# Altium PCB IPD171.PcbDoc
Units mm, origin at the board's own origin, x right, y up, seen from the top; angles counter-clockwise.
Board outline 30 x 30 mm, 2 copper layers (Top Layer, Bottom Layer); 1 components, 3 nets, 11 pads, 0 vias.
Unrouted connection lines stored in the file: 1.
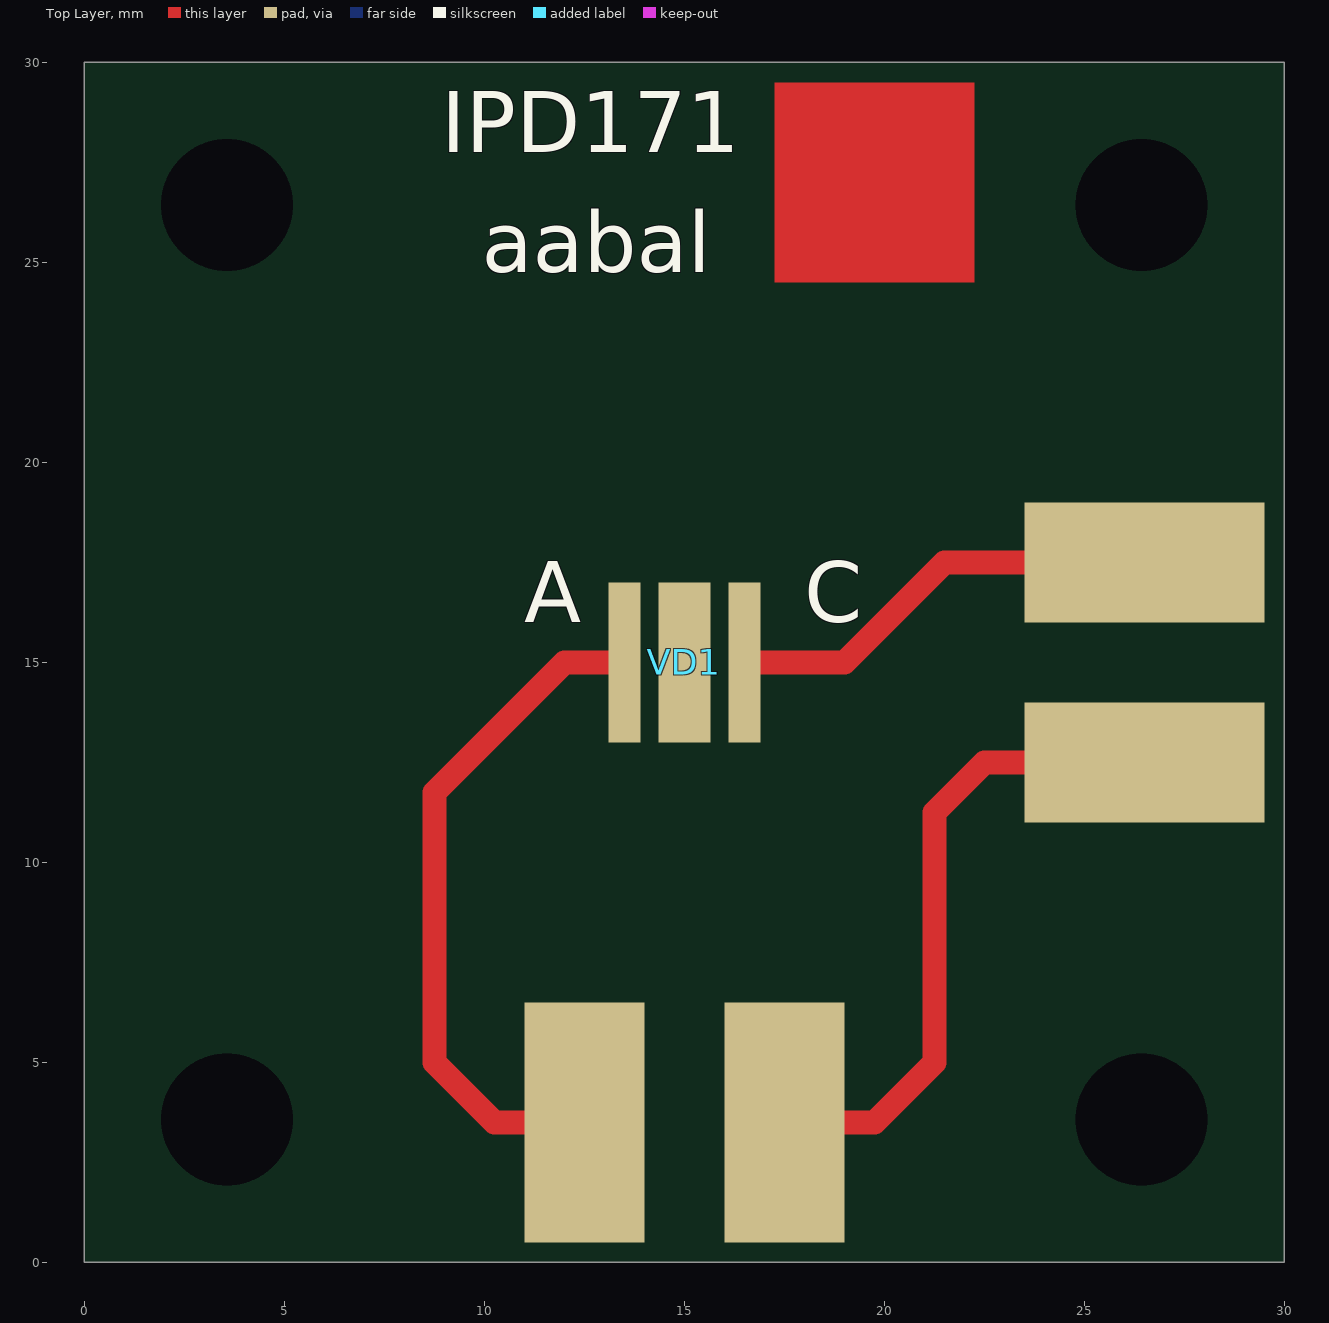
[diagram p0: Top Layer view]
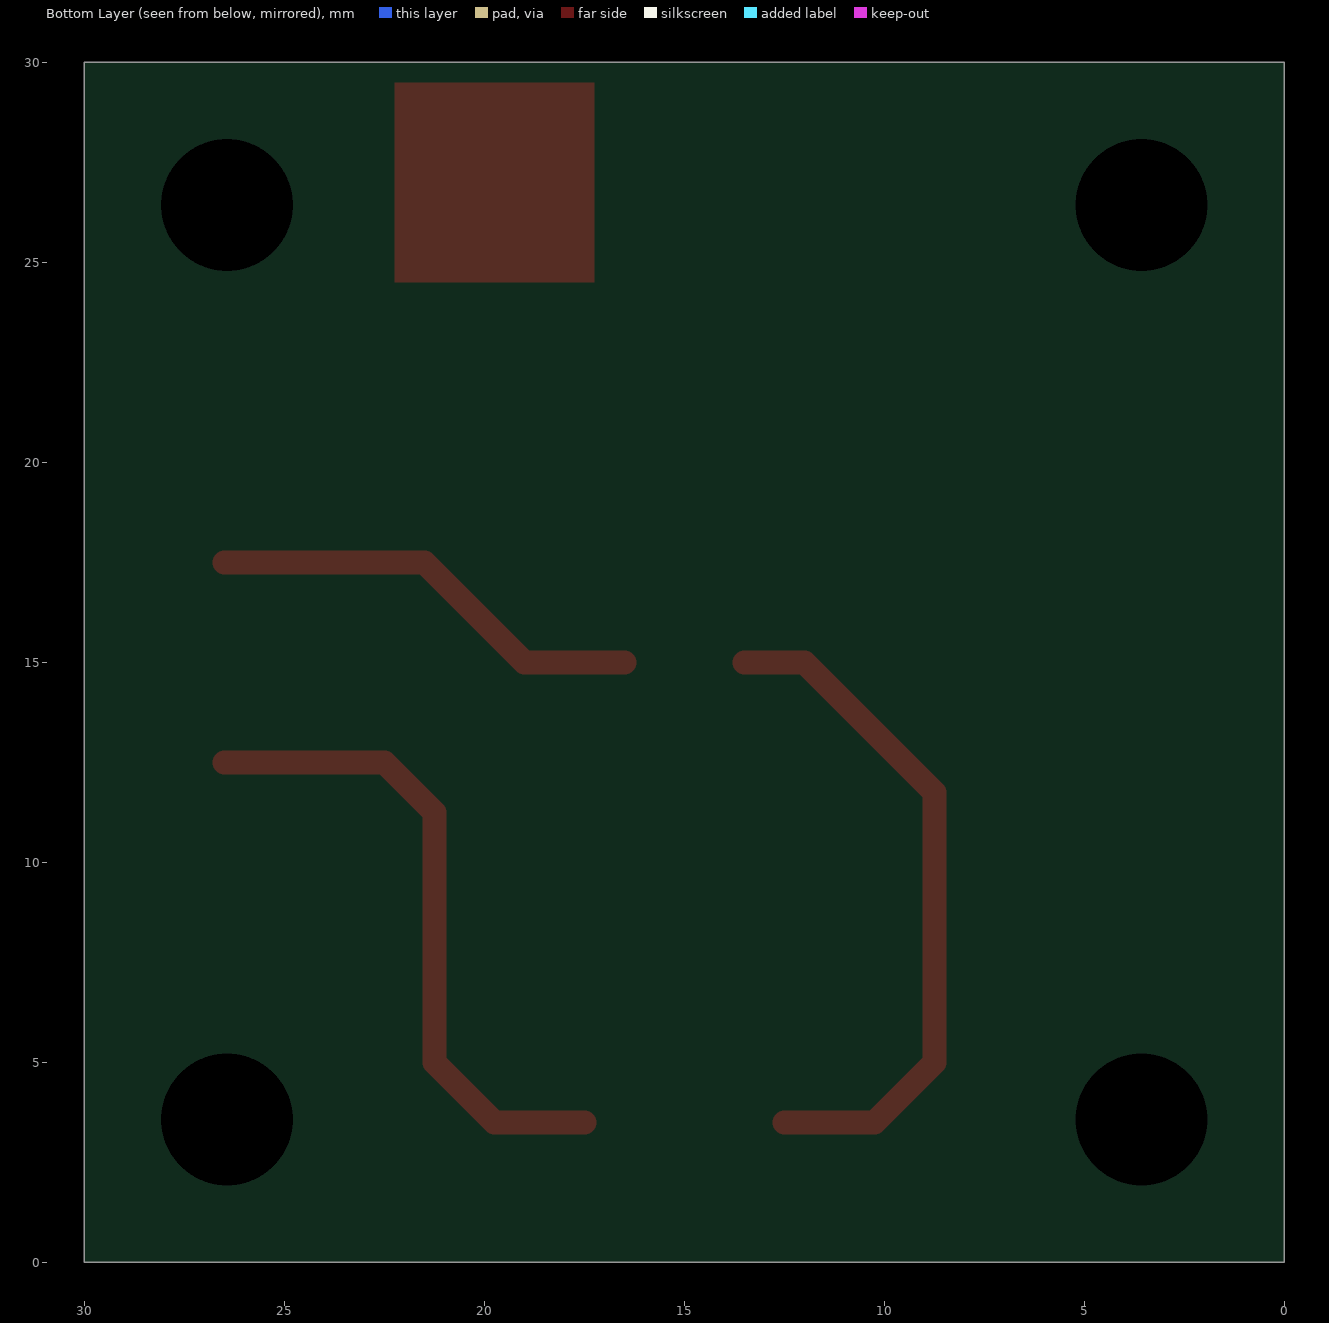
[diagram p1: Bottom Layer view, seen from below]

## Layer stack, top to bottom
Top Solder: solder mask 0.0102, Solder Resist, Dk 3.5
Top Layer: signal copper 0.0356
Dielectric 1: dielectric 0.32, FR-4, Dk 4.8
Bottom Layer: signal copper 0.0356
Bottom Solder: solder mask 0.0102, Solder Resist, Dk 3.5

## Board outline
0,0 0,30 30,30 30,0

## Design rules (kind name [scope] priority, off if disabled: settings)
Clearance [All] p1: gap=0.254 ignorepadtopadclearanceinfootprint=FALSE except(0: Arc-Hole Track-Hole SMDPad-Hole THPad-Hole Via-Hole Fill-Hole Poly-Hole Region-Hole Text-Hole)
PolygonConnect [All] p1: connectstyle=Relief reliefconductorwidth=0.254 reliefentries=4 polygonreliefangle="90 Angle" airgapwidth=0.254
RoutingVias [All] p1: holewidth=0.711 width=1.27 viastyle="Through Hole" minholewidth=0.711 minwidth=1.27 maxholewidth=0.711 maxwidth=1.27
SolderMaskExpansion [All] p1: expansion=0.102
Width [All] p1: maxlimit=0.6 minlimit=0.254 preferedwidth=0.254 minimp=50.000000 maximp=50.000000 favimp=50.000000
30 further rules are at their usual default settings.

## Components (designator, comment, footprint, x,y, rotation, side; value= is the part's Value field where it differs from the comment)
VD1 "IPD171" IPD171 15,15 r0 top

## Footprints (in the part's own frame and the unit in brackets; to place one, negate y for a bottom-side part, rotate by r counter-clockwise, add the part's x,y. Pads: shape width x height; smd on the part's side, far side on the other; paste and mask are expansions set on the pad)
IPD171 [mm]
  rect 0.8x4 smd: 1(-1.5,0) 2(1.5,0)
  rect 1.3x4 smd: 3(0,0)
  body extent -1.75,-1.75 3.93,1.75, height 3.55

## Free pads (board coordinates)
  round 3 hole 3.3 unplated: 0(3.57,3.57) 0(3.57,26.43) 0(26.43,3.57) 0(26.43,26.43)
  rect 3x6 smd: 1(12.5,3.5) 2(17.5,3.5)
  rect 6x3 smd: 1(26.5,12.5) 2(26.5,17.5)

## Nets (pads, with @x,y where several pads share a name; then routed paths per layer and width w, separated by ;. In a path a pad name is that pad's centre, name@x,y a point inside that pad or via, vN(x,y) a via of type N, cw(c..) or ccw(c..) an arc to the next point about the centre after c; other vN are vias at no path point)
Anode: pad.1@12.5,3.5 VD1.1 | length 17.2
  Top Layer w0.6: pad.1@12.5,3.5 10.25,3.5 8.75,5 8.75,11.75 12,15 VD1.1
Cathode: pad.1@26.5,12.5 pad.2 VD1.2 | length 27.4
  Top Layer w0.6: VD1.2 19,15 21.5,17.5 pad.2@26.5,17.5 ; pad.2@17.5,3.5 19.75,3.5 21.25,5 21.25,11.25 22.5,12.5 pad.1@26.5,12.5
N/C: VD1.3

## Other copper
Top Layer:
  rectangle: 17.25,24.5 22.25,29.5

## Silkscreen, mask and mechanical layers (free items; w line width, h text height)
Top Overlay:
  text "IPD171" at 8.917,27.75 h1.52
  text "aabal" at 9.933,24.75 h1.52
  text "A" at 11,16 h1.52
  text "C" at 18,16 h1.52
Mechanical 1:
  the board outline again, w0.254